# Altium PCB Controller_layout_typeC.PcbDoc
Units mil, origin at the board's own origin, x right, y up, seen from the top; angles counter-clockwise.
Board outline 1390.03 x 1150.03 mil, 2 copper layers (Top Layer, Bottom Layer); 23 components, 46 nets, 169 pads, 64 vias.
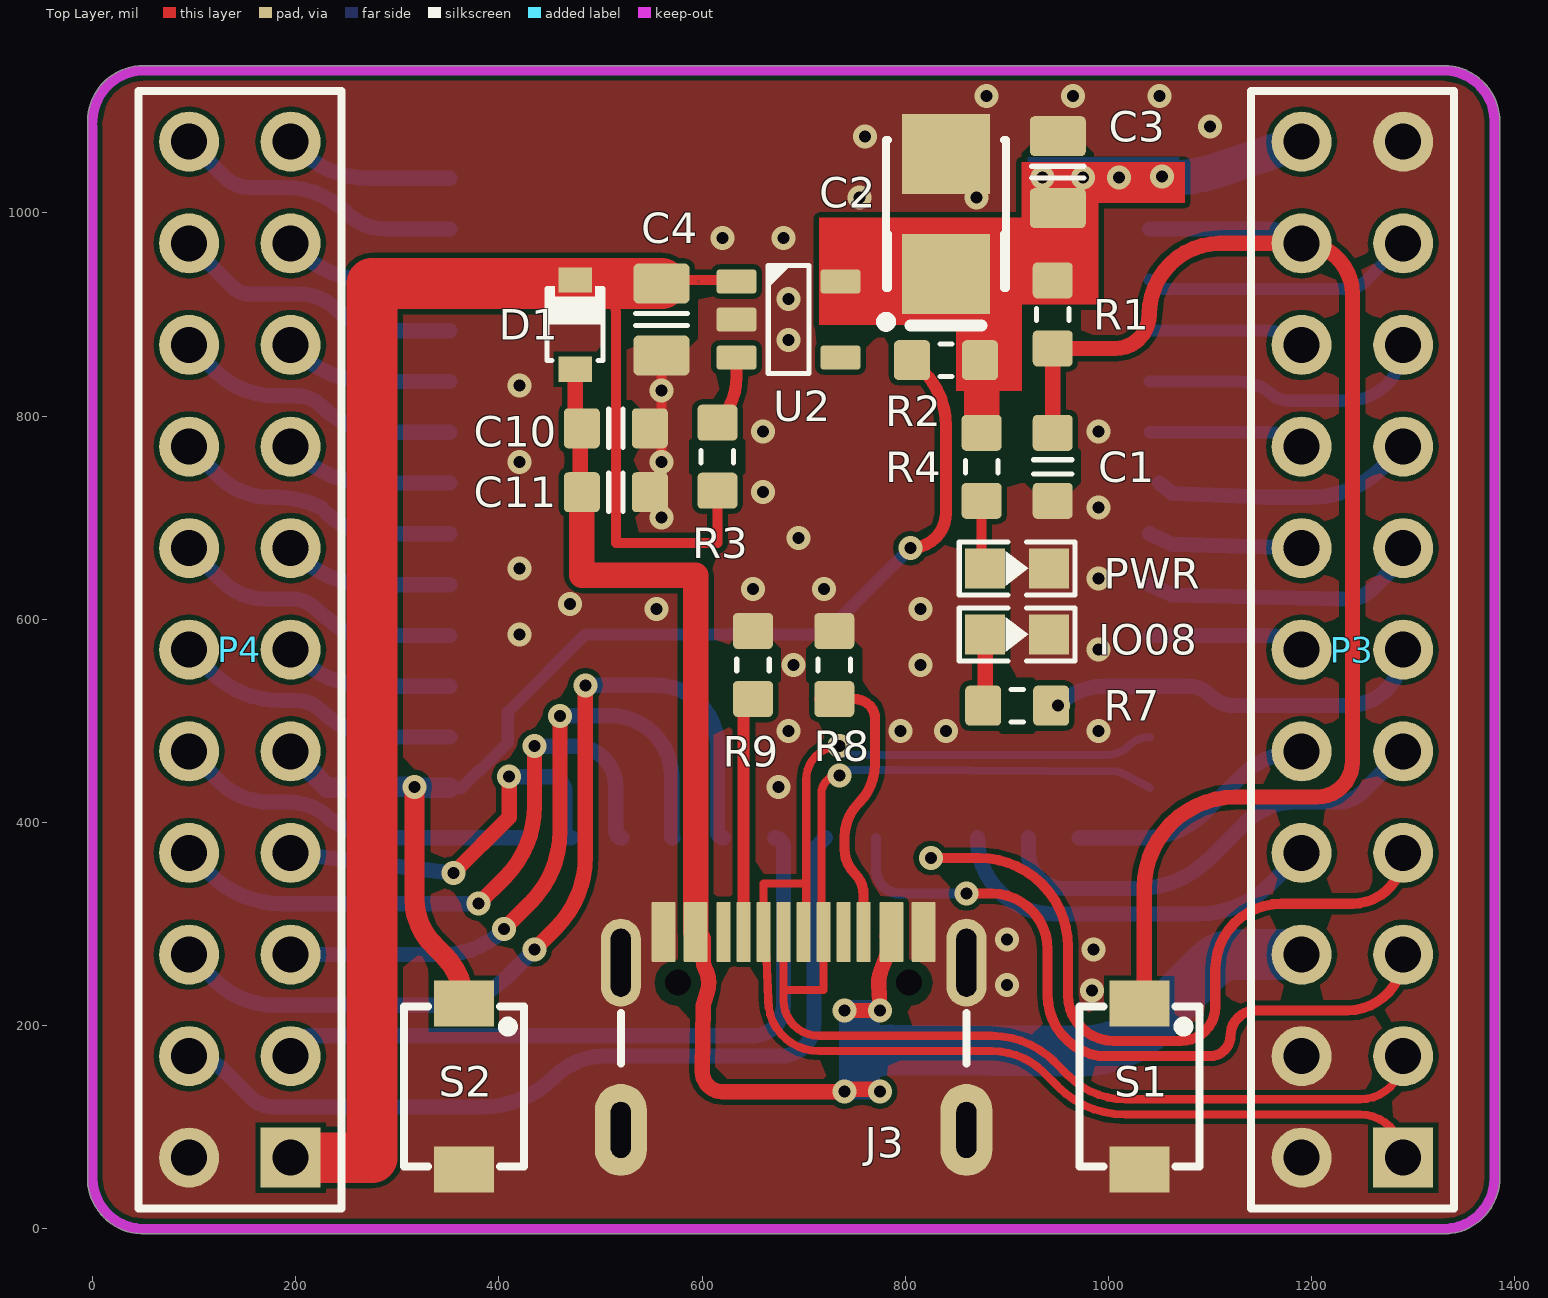
[diagram p0: Top Layer view]
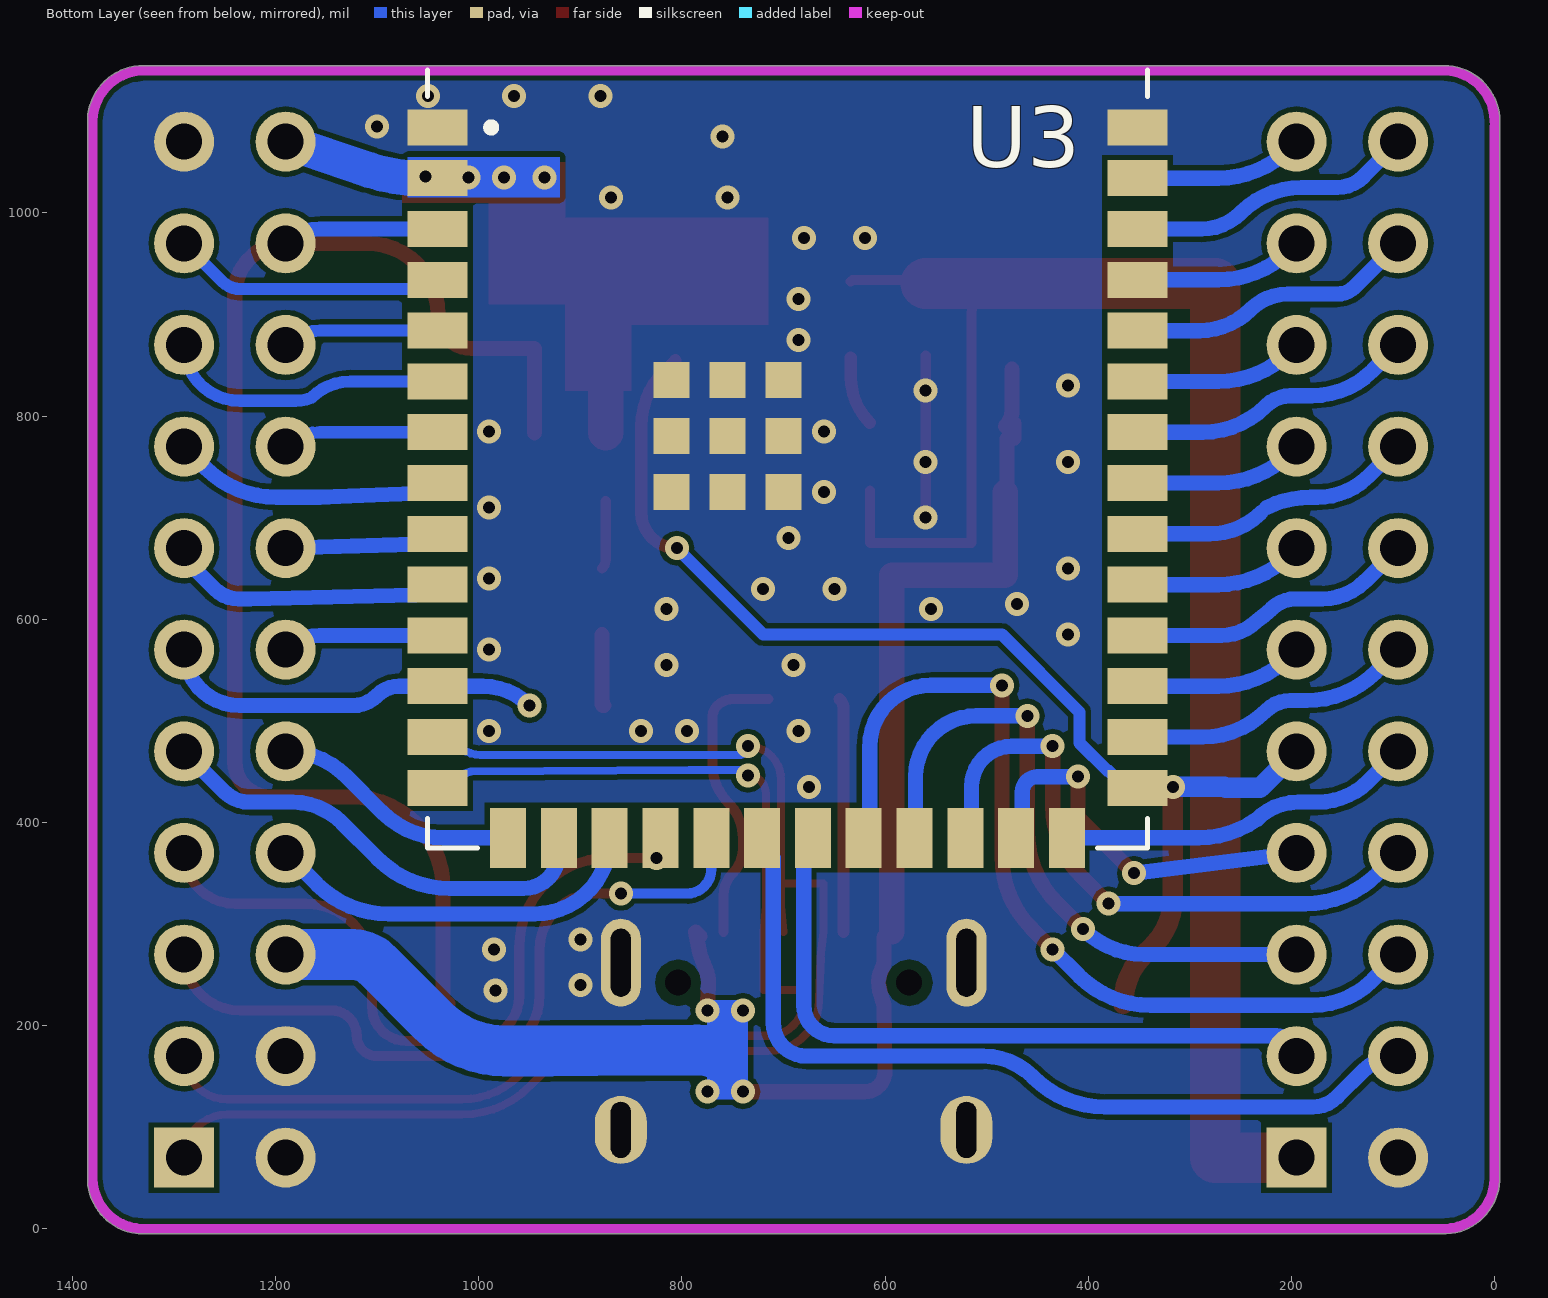
[diagram p1: Bottom Layer view, seen from below]
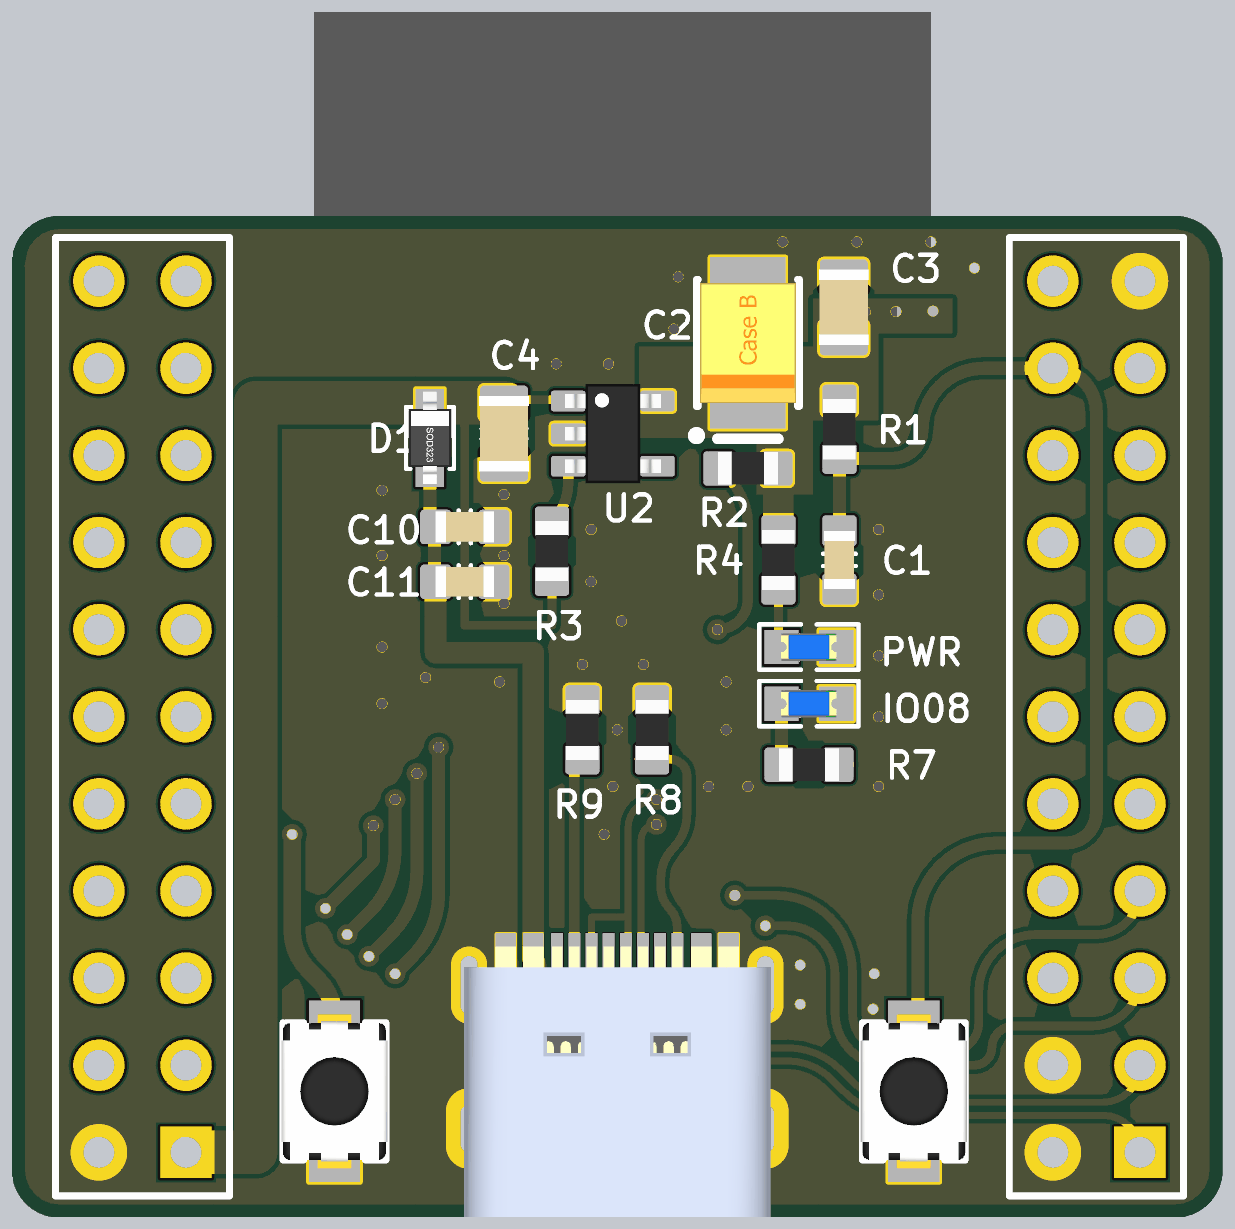
[diagram p2: 3D render of the assembled board from above, using the file's embedded part models]

## Layer stack, top to bottom
Top Solder: solder mask 0.4, Solder Resist, Dk 3.5
Top Layer: signal copper 1.4
Dielectric 1: dielectric 12.6, FR-4, Dk 4.8
Bottom Layer: signal copper 1.4
Bottom Solder: solder mask 0.4, Solder Resist, Dk 3.5

## Board outline
47.61,-4.96 cw(c50,50) -4.96,47.61 -5.01,48.33 -5.01,1090 cw(c50,1090) 50,1145.02 1330,1145.01 cw(c1330,1090) 1384.56,1097.1 1385.01,1095 1385.01,45 1384.56,42.9 cw(c1330,50) 1337.1,-4.56 1335,-5.01

## Design rules (kind name [scope] priority, off if disabled: settings)
BoardOutlineClearance [All] p1: gap=7.87 ignorepadtopadclearanceinfootprint=FALSE
Clearance [All] p1: gap=5 ignorepadtopadclearanceinfootprint=FALSE except(9.84: Arc-Hole Track-Hole SMDPad-Hole THPad-Hole Via-Hole Fill-Hole Poly-Hole Region-Hole Text-Hole)
ComponentClearance [All] p1: gap=5 collisioncheckmode=3 verticalgap=5 showdistances=TRUE
DiffPairsRouting [All] p1: maxlimit=10 minlimit=5 mostfreqgap=5 toplayer_minwidth=5 toplayer_maxwidth=1000 toplayer_prefwidth=5 bottomlayer_minwidth=5 bottomlayer_maxwidth=1000 bottomlayer_prefwidth=5 maxuncoupledlength=500
Height [All] p1: minheight=0 maxheight=71497.94 prefheight=500
HoleSize [All] p1: absolutevalues=TRUE maxlimit=248.03 minlimit=11.81 maxpercent=80.000 minpercent=20.000
HoleToHoleClearance [All] p1: gap=9.84 allowstackedmicrovias=FALSE
MinimumAnnularRing [All] p1: minimumring=3
MinimumSolderMaskSliver [All] p1: minsoldermaskwidth=0
PlaneClearance [All] p1: clearance=5
PlaneConnect PlaneConnectPowerPads [InPadClass('PowerPads')] p1: planeconnectstyle=Direct reliefexpansion=20 reliefentries=4 reliefconductorwidth=10 reliefairgap=10
PlaneConnect [All] p2: planeconnectstyle=Direct reliefexpansion=11.81 reliefentries=4 reliefconductorwidth=5 reliefairgap=5
PolygonConnect PolygonConnectPowerPads [All vs (InPadClass('PowerPads'))] p1: connectstyle=Direct reliefconductorwidth=10 reliefentries=4 polygonreliefangle="90 Angle" airgapwidth=10
PolygonConnect [All] p2: connectstyle=Direct reliefconductorwidth=5 reliefentries=4 polygonreliefangle="90 Angle" airgapwidth=5
RoutingVias [All] p1: holewidth=11.81 width=23.62 viastyle="Through Hole" minholewidth=11.81 minwidth=23.62 maxholewidth=23.62 maxwidth=259.84
SilkToSilkClearance [All] p1: silktosilkclearance=0
SilkToSolderMaskClearance [IsPad] p1: minsilkscreentomaskgap=5 clearancetoexposedcopper=TRUE
SolderMaskExpansion [All] p1: expansion=2.95 istentingtop=FALSE
Width [All] p1: maxlimit=1000 minlimit=5 preferedwidth=5 minimp=50.000000 maximp=50.000000 favimp=50.000000
20 further rules are at their usual default settings.

## Classes and differential pairs
differential pair D: +D_P -D_N

## Components (designator, comment, footprint, x,y, rotation, side; value= is the part's Value field where it differs from the comment)
C1 "Cap Semi" CAPC1608X90N 945,750 r90 top value=10uF
C2 "100uF TAJB107M006RNJ" SMT_C_Tantalum_B 840,999.06 r90 top
C3 "10uF 25V" CAPC2012X135N 950,1040 r90 top
C4 "10uF 25V" CAPC2012X135N 560,895 r270 top
C10 "Cap Semi" CAPC1608X90N 515,787.93 r180 top value=10uF
C11 "Cap Semi" CAPC1608X90N 515,725 r0 top value=100nF
D1 "1N5819/SS14/S4(SOD_323)" SMT_DIODE_SOD_323 475,890 r90 top
IO08 "BLUE" SMT_LED_0603 910,585 r0 top (schematic designator LED1)
J3 "USB-C" "USB-C 8p" 690,-5 r0 top
P3 "Header 11X2" HDR2X11 1290,70 r90 top locked
P4 "Header 11X2" HDR2X11 195,70 r90 top locked
PWR "BLUE" SMT_LED_0603 910,650 r0 top (schematic designator LED2)
R1 "Resistor" RESC1608N_ZERO 945,900 r90 top value=10K
R2 "Resistor" RESC1608N_ZERO 840,855 r0 top value=10K
R3 "Resistor" RESC1608N_ZERO 615,760 r270 top value=10K
R4 "Resistor" RESC1608N_ZERO 875,750 r270 top value=1K
R7 "Resistor" RESC1608N_ZERO 910,515 r180 top value=1K
R8 "Resistor" RESC1608N_ZERO 650,555 r270 top value=10K
R9 "Resistor" RESC1608N_ZERO 730,555 r90 top value=10K
S1 "KEY_RST/USER" SMT_SW_PTS_820 1030.43,140 r270 top
S2 "KEY_RST/USER" SMT_SW_PTS_820 365.43,140 r270 top
U2 "AP2112K-3.3TRG1" SOT23-5 685,895 r0 top
U3 "ESP32-S3-WROOM-1-N4R2" ESP32-S3-WROOM-1_NO-KEEPOUT 696.06,876.97 r180 bottom locked

## Footprints (in the part's own frame and the unit in brackets; to place one, negate y for a bottom-side part, rotate by r counter-clockwise, add the part's x,y. Pads: shape width x height; smd on the part's side, far side on the other; paste and mask are expansions set on the pad)
CAPC1608X90N [mm] "Chip Capacitor, Body 1.6x0.8mm, EIA 0603, IPC Medium Density"
  round 0.254 on Mech15: 0(0,0)
  rrect25% 0.9x1 smd: 1(-0.85,0) 2(0.85,0)
  Top Layer pour cut-out: -0.6,0.5 -0.4,0.7 0.4,0.7 0.6,0.5 0.6,-0.5 0.4,-0.7 -0.4,-0.7 -0.6,-0.5
  silkscreen extent -0.18,-0.48 0.18,0.48, body extent -0.85,-0.45 0.85,0.45, height 0.89
CAPC2012X135N [mm] "Chip Capacitor, Body 2.0x1.2mm, EIA 0805, IPC Medium Density"
  round 0.254 on Mech15: 0(0,0)
  rrect25% 1x1.4 smd: 1(-0.9,0) 2(0.9,0)
  Top Layer pour cut-out: -0.675,0.7 -0.475,0.9 0.475,0.9 0.675,0.7 0.675,-0.7 0.475,-0.9 -0.475,-0.9 -0.675,-0.7
  silkscreen extent -0.15,-0.65 0.15,0.65, body extent -1.1,-0.72 1.1,0.73, height 1.34
ESP32-S3-WROOM-1_NO-KEEPOUT [mm]
  rect 1.5x0.9 smd: 1(-8.75,5.26) 2(-8.75,3.99) 3(-8.75,2.72) 4(-8.75,1.45) 5(-8.75,0.18) 6(-8.75,-1.09) 7(-8.75,-2.36) 8(-8.75,-3.63) 9(-8.75,-4.9) 10(-8.75,-6.17) 11(-8.75,-7.44) 12(-8.75,-8.71) 13(-8.75,-9.98) 14(-8.75,-11.25) 27(8.75,-11.25) 28(8.75,-9.98) 29(8.75,-8.71) 30(8.75,-7.44) 31(8.75,-6.17) 32(8.75,-4.9) 33(8.75,-3.63) 34(8.75,-2.36) 35(8.75,-1.09) 36(8.75,0.18) 37(8.75,1.45) 38(8.75,2.72) 39(8.75,3.99) 40(8.75,5.26)
  rect 0.9x1.5 smd: 15(-6.985,-12.5) 16(-5.715,-12.5) 17(-4.445,-12.5) 18(-3.175,-12.5) 19(-1.905,-12.5) 20(-0.635,-12.5) 21(0.635,-12.5) 22(1.905,-12.5) 23(3.175,-12.5) 24(4.445,-12.5) 25(5.715,-12.5) 26(6.985,-12.5)
  rect 0.9x0.9 smd: 41_1(-1.5,-2.46) 41_2(-2.9,-2.46) 41_3(-0.1,-2.46) 41_4(-2.9,-3.86) 41_5(-1.5,-3.86) 41_6(-0.1,-3.86) 41_7(-2.9,-1.06) 41_8(-1.5,-1.06) 41_9(-0.1,-1.06)
  silkscreen extent -9,-12.75 9,6.7, body extent -9,-12.75 9,12.75, height 3.25
HDR2X11 [mm] "Connector; Header; 11x2 Position"
  rect 1.5x1.5 hole 0.9: 1(0,0)
  round 1.5 hole 0.9: 2(0,2.54) 3(2.54,0) 4(2.54,2.54) 5(5.08,0) 6(5.08,2.54) 7(7.62,0) 8(7.62,2.54) 9(10.16,0) 10(10.16,2.54) 11(12.7,0) 12(12.7,2.54) 13(15.24,0) 14(15.24,2.54) 15(17.78,0) 16(17.78,2.54) 17(20.32,0) 18(20.32,2.54) 19(22.86,0) 20(22.86,2.54) 21(25.4,0) 22(25.4,2.54)
  silkscreen extent -1.27,-1.27 26.67,3.81, body extent -1.27,-1.27 26.67,3.81, height 1.5
RESC1608N_ZERO [mm] "Chip Resistor, Body 1.6x0.8mm, 0603, IPC Medium Density"
  round 0.254 on Mech15: 0(0,0)
  rrect25% 0.9x1 smd: 1(-0.85,0) 2(0.85,0)
  Top Layer pour cut-out: -0.6,0.5 -0.4,0.7 0.4,0.7 0.6,0.5 0.6,-0.5 0.4,-0.7 -0.4,-0.7 -0.6,-0.5
  silkscreen extent -0.15,-0.41 0.15,0.41, body extent -0.87,-0.47 0.88,0.48, height 0.54
SMT_C_Tantalum_B [mm]
  rect 2x2.2 smd: 1(-1.5,0) 2(1.5,0)
  silkscreen extent -2.82,-1.5 1.85,1.62, body extent -1.75,-1.4 1.75,1.4, height 1.9
SMT_DIODE_SOD_323 [mm]
  rect 0.63x0.83 smd: 1(-1.115,0) 2(1.115,0)
  silkscreen extent -0.9,-0.7 0.96,0.7, body extent -1.35,-0.62 1.35,0.62, height 1.1
SMT_LED_0603 [mm]
  rect 1x1 smd: 1(-0.8,0) 2(0.8,0)
  silkscreen extent -1.45,-0.66 1.45,0.66, body extent -0.81,-0.4 0.81,0.4, height 0.6
SMT_SW_PTS_820 [mm]
  rect 1.143x1.5 smd: 1(-2.075,0) 2(2.075,0)
  round 0 all layers, no hole paste-2.54 mask-2.54: MH1(0,0.9) MH2(0,-0.9)
  silkscreen extent -2,-1.5 2,1.5, body extent -2.25,-1.55 2.25,1.55, height 2.05
SOT23-5 [mm]
  round 0.5 on Mech15: 0(0,0)
  rrect25% 1x0.6 smd: 1(-1.3,0.95) 2(-1.3,0) 3(-1.3,-0.95) 4(1.3,-0.95) 5(1.3,0.95)
  silkscreen extent -0.51,-1.35 0.51,1.35, body extent -1.4,-1.45 1.4,1.45, height 1.44
"USB-C 8p" [mm]
  rrect10% 0.6x1.5 smd mask+0.025: A1/B12(-3.25,7.55) A4/B9(-2.45,7.55) A9/B4(2.45,7.55) A12/B1(3.25,7.55)
  rrect10% 0.35x1.5 smd mask+0.025: A5(-1.25,7.55) A6(-0.25,7.55) A6(0.75,7.55) A7(-0.75,7.55) A7(0.25,7.55) B5(1.75,7.55) ""(-1.75,7.55) ""(1.25,7.55)
  oval 1.3x2.3 / inner oval 1.3x2.3 / far side oval 1.3x1.7 hole 1.4 slot 0.5 at 0 deg mask+0.025: SHLD(-4.32,2.6) SHLD(4.32,2.6)
  oval 1x2.2 hole 1.7 slot 0.5 at 0 deg mask+0.025: SHLD(-4.32,6.78) SHLD(4.32,6.78)
  round 0 hole 0.65 unplated mask+0.025: ""(-2.89,6.28) ""(2.89,6.28)
  silkscreen extent -4.32,4.26 4.32,5.52, body extent -4.47,0 4.47,7.9, height 3.2

## Part data
C1 C10: library part CAP-SM-0603-X5R-10uF, "CAP SM 0603 X5R 10uF 10%", Supplier Part Number 1=2366833, Tolerance=±10%, Supplier 1=Farnell, Supplier 2=Digi-Key, Supplier Part Number 2=490-3896-1-ND
C2: library part SMT_C_Tantalum_B, "Capacitor, SM Tantalum; Body 3.5 x 2.8 mm (LxW typ)"
C3 C4: library part SMT_C_0805, "Surface mount capacitor 0805"
C11: library part CAP-SM-0603-X7R-100nF, "CAP SM 0603 X7R 100nF 10%", Supplier Part Number 1=490-3167-1-ND, Tolerance=±10%, Supplier 1=Digi-Key, Supplier 2=Farnell, Supplier Part Number 2=1775994RL
D1: library part SMT_DIODE_SCHOTTKY_SOD_323, "Surface mount schottky diode SOD-323(0805) Package"
IO08 PWR: library part SMT_LED_0603, "SMT LED"
P3 P4: "Header, 11-Pin, Dual row", LatestRevisionDate=17-Jul-2002, LatestRevisionNote="Re-released for DXP Platform.", Publisher="Altium Limited"
R1 R2 R3 R8 R9: library part RES-SM-0603-10K, "RES SM 0603 10K", Supplier Part Number 1=9330399, Supplier 1=Farnell, Supplier 2=Digi-Key, Supplier Part Number 2=541-10.0KHCT-ND
R4 R7: library part RES-SM-0603-1K, "RES SM 0603 1K"
S1 S2: library part SMT_SW_PTS_820, "SMT Tactile ‎Switch PTS 820 Series"
U2: "Linear Voltage Regulator IC 1 Output 600mA SOT-25", Package="SOT-753 Diodes Inc.", Digi-Key_Part_Number=AP2112K-3.3TRG1DICT-ND, Digi-Key_Purchase_URL=https://www.digikey.com.au/product-detail/en/diodes-incorporated/AP2112K-3.3TRG1/AP2112K-3.3TRG1DICT-ND/4505257?utm_source=snapeda&utm_medium=aggregator&utm_campaign=symbol, MF="Diodes Inc.", MP=AP2112K-3.3TRG1, SnapEDA_Link=https://www.snapeda.com/parts/AP2112K-3.3TRG1/Diodes%20Inc./view-part/454988/?ref=snap
U3: library part ESP32-S3-WROOM-1, "Multiprotocol Modules SMD Module, ESP32-S3R8, 3.3V, 8 MB Octal PSRAM Die, 16 MB Quad SPI Flash, PCB Antenna", MPN=ESP32-S3-WROOM-1-N16R2, Package="Module Espressif Systems", Check_prices=https://www.snapeda.com/parts/ESP32-WROOM-32/Espressif+Systems/view-part/?ref=eda, Digi-Key_Part_Number=1965-ESP32-S3-WROOM-1-N16R2TR-ND, MF="Espressif Systems", price=3.98, SnapEDA_Link=https://www.snapeda.com/parts/ESP32-WROOM-32/Espressif+Systems/view-part/?ref=snap, Supplier=Digikey, Supplier Link=https://www.digikey.com/en/products/detail/espressif-systems/ESP32-S3-WROOM-1-N16R2/16162644

## Via types
v1: diameter 23.62, hole 11.81, Top Layer to Bottom Layer, tented both sides, 64 vias

## Nets (pads, with @x,y where several pads share a name; then routed paths per layer and width w, separated by ;. In a path a pad name is that pad's centre, name@x,y a point inside that pad or via, vN(x,y) a via of type N, cw(c..) or ccw(c..) an arc to the next point about the centre after c; other vN are vias at no path point)
3.3V: C2.1 C3.1 P3.22 R1.2 R2.2 R4.1 U2.5 U3.2 | length 508.4
  Top Layer w8: U2.5 942.43,932.4 ccw(c942.43,936.03) R1.2 ccw(c932.93,945.54) 950,945.54 C3.1
  Top Layer w35: R2.2 cw(c869.76,851.29) 875,851.29 R4.1
  Bottom Layer w35: U3.2 1058.22,1034.05 ccw(c1058.22,1188.6) 1107.7,1042.19 P3.22
  other v1: 935,1035 975,1035 1010,1035 1052.4,1035.6
5V: C4.1 D1.2 P4.1 R3.2 U2.1 | length 1713.1
  Top Layer w10: 497.61,930.43 cw(c483.52,903.52) 505,925 cw(c480.86,900.86) 515,900.86 515,675 615,675 R3.2 ; C4.1@560,933.9 630.21,933.9 cw(c630.21,928.79) U2.1
  Top Layer w50: P4.1 275,70 275,930.43 497.61,930.43 C4.1
D_N: J3.A7 P3.1 U3.13 | length 1367.7
  Top Layer w8: J3.A7@699.84,292.24 702.37,317.77 702.37,442.37 cw(c735,442.37) 715.05,468.19 cw(c735,442.37) 730.45,474.68 cw(c735,442.37) v1(735,475) ; 699.84,340 660.47,340 660.47,292.24 663.36,266.72 665,225.15 cw(c657,225) 665,225 ccw(c715,225) 715,175 885,175 cw(c885,102.57) 936.21,153.79 950.04,139.96 ccw(c1016.34,206.26) 1016.34,112.5 1247.5,112.5 cw(c1247.5,70) P3.1
  Bottom Layer w8: v1(735,475) ccw(c743.44,475) 743.44,466.56 792.9,466.56 799.53,466.56 998.3,466.56 ccw(c998.3,497.79) 1020.39,475.7 cw(c1040.55,455.54) U3.13
D_P: J3.A6 P3.3 U3.14 | length 1370.8
  Top Layer w8: v1(735,446.38) ccw(c735,428.74) 717.37,428.74 717.37,317.77 719.53,292.24 719.53,235 680.16,235 680.16,292.24 680,292.24 680,225 ccw(c715,225) 715,190 885.04,190 cw(c885.04,102.68) 946.79,164.42 960.61,150.61 ccw(c1016.39,206.39) 1016.39,127.5 1247.5,127.5 ccw(c1247.5,170) P3.3
  Bottom Layer w8: v1(735,446.38) cw(c740.14,446.38) 740.14,451.52 792.81,451.52 1007.43,450.19 1007.8,450.08 1015.02,447.77 U3.14
GND: C1.1 C2.2 C3.2 C4.2 C10.1 C11.2 IO08.2 J3.A1/B12 J3.A12/B1 J3.SHLD P3.2 P3.4 P3.21 P4.2 PWR.2 R8.1 R9.2 S1.2 S2.2 U2.2 U3.1 U3.40 U3.41_1 U3.41_2 U3.41_3 U3.41_4 U3.41_5 U3.41_6 U3.41_7 U3.41_8 U3.41_9 | length 159.6
  Top Layer w10: v1(560,700) v1(560,755) v1(560,825) C4.2
  other v1: 983.57,234.43 900,240 985,275 900,285 675,435 685,490 795,490 840,490 990,490 690,555 815,555 990,570 420,585 555,610 815,610 470,615 650,630 720,630 990,640 420,650 695,680 990,710 660,725 420,755 660,785 990,785 420,830 685,875 685,915 620,975 680,975 755,1015 870,1015 760,1075 1100,1085 880,1115 965,1115 1050,1115
IO0: P4.9 R2.1 S2.1 U3.27 | length 1185
  Top Layer w12: v1(805,670) ccw(c805,705) 840,705 840,790 ccw(c763.87,790) 826.96,832.6 ccw(c763.87,790) 817.7,843.83 R2.1
  Top Layer w20: v1(316.81,435) 316.81,324.83 316.81,324.77 ccw(c380.98,324.77) 335.59,279.41 335.68,279.32 345.72,269.28 cw(c298.14,221.69) S2.1
  Bottom Layer w12: U3.27 363.39,434.06 380.11,450.78 381.1,450.78 408.54,478.22 408.54,508.54 485,585 720,585 v1(805,670)
  Bottom Layer w20: P4.9 201.66,463.34 230.94,434.06 265,434.06 265.94,435 v1(316.81,435) ; v1@315.94,434.06 U3.27
IO01: P4.21 U3.39 | length 167.2
  Bottom Layer w15: P4.21 201.66,1063.34 ccw(c272.37,1134.06) 272.37,1034.06 U3.39
IO02: P4.22 U3.38 | length 284.6
  Bottom Layer w15: P4.22 129.39,1035.61 ccw(c155,1061.21) 155,1025 189.64,1025 cw(c189.64,939.64) 250,1000 ccw(c288.49,1038.49) 288.49,984.06 U3.38
IO03: P3.10 U3.15 | length 246.9
  Bottom Layer w15: U3.15 1034.26,384.84 ccw(c1034.26,470.74) 1095,410 1130.25,445.25 cw(c1190,385.5) P3.10
IO04: P3.19 U3.4 | length 270.7
  Bottom Layer w12: U3.4 1049.61,925 1234.14,925 ccw(c1234.14,951.21) 1252.68,932.68 P3.19
IO05: P3.18 U3.5 | length 153.2
  Bottom Layer w12: U3.5 1156.07,884.06 cw(c1156.07,836.07) P3.18
IO06: P3.17 U3.6 | length 285.5
  Bottom Layer w12: U3.6 1126.04,834.06 cw(c1126.04,779.85) 1148.92,828.99 cw(c1126.04,779.85) 1164.36,818.18 ccw(c1180.26,856.29) 1180.26,815 1235,815 ccw(c1235,870) P3.17
IO07: P3.16 U3.7 | length 153.2
  Bottom Layer w12: U3.7 1156.07,784.06 cw(c1156.07,736.07) P3.16
IO08: P3.11 U3.12 | length 381.6
  Bottom Layer w15: v1(950,515) cw(c996,469) 996,534.06 U3.12 1078.14,534.06 cw(c1078.14,503.14) 1100,525 ccw(c1124.14,549.14) 1124.14,515 1235,515 ccw(c1235,570) P3.11
IO9: P3.8 U3.17 | length 382.6
  Bottom Layer w15: U3.17 871.06,383.94 ccw(c945,383.94) 880,348.7 ccw(c945,383.94) 945,310 1088.58,310 ccw(c1088.58,410) 1159.29,339.29 P3.8
IO10: P3.7 U3.18 | length 709.3
  Top Layer w10: v1(825,365) 872.5,365 cw(c872.5,277.5) 960,277.5 960,230 ccw(c1005,230) 1005,185 1071.31,185 ccw(c1071.31,218.69) 1105,218.69 1105,255 cw(c1170,255) 1170,320 1240,320 ccw(c1240,370) P3.7
IO11: P3.5 U3.19 | length 731.7
  Top Layer w10: v1(860,330) 885,330 cw(c885,275) 940,275 940,230 ccw(c1000.95,230) 990.24,170 1099.96,170 ccw(c1099.96,190.04) 1120,190.04 cw(c1144.96,190.04) 1144.96,215 1235,215 ccw(c1235,270) P3.5
  Bottom Layer w10: U3.19 771.06,353.94 ccw(c795,353.94) 795,330 v1(860,330)
IO12: P4.4 U3.20 | length 841.1
  Bottom Layer w15: P4.4 cw(c95,121.72) 129.14,155.86 155,130 ccw(c179.14,154.14) 179.14,120 383.58,120 ccw(c383.58,220) 454.29,149.29 455,150 cw(c503.28,101.72) 503.28,170 677.39,170 ccw(c677.39,202.61) 710,202.61 U3.20@710,365 ; U3.20@710.85,374.63 U3.20
IO13: P4.3 U3.21 | length 683.5
  Bottom Layer w15: P4.3 cw(c215,170) 215,190 650,190 ccw(c650,220) 680,220 680,375.91 ccw(c671.06,375.91) U3.21
IO14: P4.6 U3.22 | length 909.8
  Top Layer w15: v1(435,275) 455.71,295.71 ccw(c385,366.42) 485,366.42 v1(485,535)
  Bottom Layer w15: P4.6 120.25,244.75 ; 120.28,244.72 ccw(c180,304.5) 180,220 338.58,220 ccw(c338.58,320) 409.29,249.29 v1(435,275) ; v1(485,535) 555,535 cw(c555,475) 615,475 615,390.91 ccw(c621.06,390.91) U3.22
IO15: P3.15 U3.8 | length 260.1
  Bottom Layer w15: U3.8@1050,734.06 1062.58,723.84 1114.9,721.71 1156.79,720 1198.58,720 ccw(c1198.58,820) 1269.29,749.29 P3.15
IO16: P3.14 U3.9 | length 151.8
  Bottom Layer w15: U3.9 1062.58,673.84 P3.14
IO17: P3.13 U3.10 | length 275.8
  Bottom Layer w15: U3.10 1062.58,623.84 1225,620 1235.86,620 ccw(c1235.86,654.14) 1260,630 1282.93,652.93 ccw(c1265.86,670) P3.13
IO18: P3.12 U3.11 | length 153.2
  Bottom Layer w15: U3.11 1156.07,584.06 cw(c1156.07,536.07) P3.12
IO21: P4.5 U3.23 | length 650.2
  Top Layer w15: v1(405,295) 430.71,320.71 ccw(c360,391.42) 460,391.42 v1(460,505)
  Bottom Layer w15: P4.5 344.64,270 ccw(c344.64,355.36) v1(405,295) ; v1(460,505) 510,505 cw(c510,445) 570,445 570,385.91 ccw(c571.06,385.91) U3.23
IO35: P4.12 U3.28 | length 282.7
  Bottom Layer w15: P4.12 116.72,548.28 ccw(c185,616.57) 185,520 200.86,520 cw(c200.86,485.86) 225,510 ccw(c287.64,572.64) 287.64,484.06 U3.28
IO36: P4.11 U3.29 | length 167.2
  Bottom Layer w15: P4.11 201.66,563.34 ccw(c272.37,634.06) 272.37,534.06 U3.29
IO37: P4.14 U3.30 | length 285.3
  Bottom Layer w15: P4.14 127.32,637.68 ccw(c170,680.36) 170,620 195.86,620 cw(c195.86,585.86) 220,610 ccw(c282.64,672.64) 234.06,598.56 ccw(c269.08,633.59) 269.08,584.06 U3.30
IO38: P4.13 U3.31 | length 167.2
  Bottom Layer w15: P4.13 201.66,663.34 ccw(c272.37,734.06) 272.37,634.06 U3.31
IO39: P4.16 U3.32 | length 275.7
  Bottom Layer w15: P4.16 123.79,741.21 ccw(c175,792.43) 138.28,730 ccw(c175,792.43) 175,720 181.02,720 cw(c181.02,620) 224.46,710.07 ; 230,705 ccw(c280.57,755.57) 252.76,689.68 ccw(c280.57,755.57) 280.57,684.06 U3.32
IO40: P4.15 U3.33 | length 167.2
  Bottom Layer w15: P4.15 201.66,763.34 ccw(c272.37,834.06) 272.37,734.06 U3.33
IO41: P4.18 U3.34 | length 283.3
  Bottom Layer w15: P4.18 120.25,844.75 ccw(c180,904.5) 180,820 200.86,820 cw(c200.86,785.86) 225,810 ccw(c287.64,872.64) 287.64,784.06 U3.34
IO42: P4.17 U3.35 | length 167.2
  Bottom Layer w15: P4.17 201.66,863.34 ccw(c272.37,934.06) 272.37,834.06 U3.35
IO43: P4.19 U3.37 | length 167.2
  Bottom Layer w15: P4.19 201.66,963.34 ccw(c272.37,1034.06) 272.37,934.06 U3.37
IO44: P4.20 U3.36 | length 285.9
  Bottom Layer w15: P4.20 137.93,927.07 ccw(c155,944.14) 155,920 203.79,920 cw(c203.79,868.79) 240,905 ccw(c290.57,955.57) 290.57,884.06 U3.36
IO45: P4.10 U3.26 | length 352.1
  Bottom Layer w15: P4.10 124.38,440.62 ccw(c174.16,490.41) 174.16,420 193.33,420 cw(c193.33,362.82) 224.2,410.95 cw(c193.33,362.82) 233.76,403.25 ccw(c291.58,484.84) 291.58,384.84 U3.26
IO46: P3.9 U3.16 | length 451
  Bottom Layer w15: U3.16 921.06,370 ccw(c956.06,370) 956.06,335 1028.58,335 ccw(c1028.58,435) 1099.29,364.29 1135,400 cw(c1183.28,351.72) 1183.28,420 1225.86,420 ccw(c1225.86,454.14) 1249.98,429.98 P3.9
IO47: P4.8 U3.24 | length 631.3
  Top Layer w15: v1(380,320) 405.71,345.71 ccw(c335,416.42) 435,416.42 v1(435,475)
  Bottom Layer w15: P4.8 115.71,349.29 ccw(c186.42,420) 186.42,320 v1(380,320) ; v1(435,475) 475,475 cw(c475,435) 515,435 515,390.91 ccw(c521.06,390.91) U3.24
IO48: P4.7 U3.25 | length 391.2
  Top Layer w15: v1(355,350) 410,405 v1(410,445)
  Bottom Layer w15: P4.7 v1(355,350) ; v1(410,445) 450,445 cw(c450,430) 465,430 465,390.91 ccw(c471.06,390.91) U3.25
NetJ3_A5: J3.A5 R8.2 | length 230.4
  Top Layer w12: J3.A5 640.79,511.37 cw(c655.17,511.37) R8.2@645,521.54
NetJ3_B5: J3.B5 R9.1 | length 288.9
  Top Layer w10: R9.1@715,521.54 749.22,521.54 cw(c749.22,499.22) 765,515 cw(c752.93,502.93) 770,502.93 770,457.43 cw(c715.86,457.43) 754.14,419.14 ccw(c788.28,385) 740,385 740,374.14 ccw(c774.14,374.14) 750,350 cw(c728.52,328.52) 758.9,328.52 J3.B5
NetLED1_1: IO08.1 R7.1 R7.2 | length 76.4
  Top Layer w15: R7.2@878.5,519.75 cw(c871.78,519.75) R7.2 ccw(c876.54,516.97) 878.5,516.97 IO08.1
NetLED2_1: PWR.1 R4.2 | length 67.5
  Top Layer w10: R4.2 875,658.46 ccw(c886.96,658.46) PWR.1
NetR3_1: R3.1 U2.3 | length 69.2
  Top Layer w12: R3.1 ccw(c569.57,838.9) 633.82,838.9 U2.3
RESET: C1.2 P3.20 R1.1 S1.1 U3.3 | length 1471.1
  Top Layer w15: C1.2 R1.1 1006.54,866.54 ccw(c1006.54,900) 1040,900 cw(c1110,900) 1110,970 P3.20 cw(c1190,920) 1240,920 1240,460 cw(c1205,460) 1205,425 1125,425 ccw(c1125,335) 1035,335 1035,226.26 cw(c1030.43,226.26) S1.1
  Bottom Layer w15: U3.3 1156.07,984.06 cw(c1156.07,936.07) P3.20
VBUS: C10.2 C11.1 D1.1 J3.A4/B9 J3.A9/B4 P3.6 | length 1549.9
  Top Layer w15: C10.2@473.46,777.93 C10.2@473.46,792.93 ; D1.1 475,805.78 ccw(c497.31,805.78) C10.2@481.54,790 ; C11.1@480,725 C10.2@480,777.93 ; J3.A4/B9 cw(c593.54,284.65) 601.13,284.65 601.13,263.32 ccw(c616.13,263.32) 602.86,256.34 cw(c576.22,242.24) 605.15,233.78 601.13,220.07 600,155 ccw(c620,155) 620,135 v1(740,135) ; v1(740,215) v1(775,215) 773.68,240.7 cw(c803.78,242.24) 775.59,252.92 782.15,270.22 J3.A9/B4 J3.A9/B4@782.15,287.93
  Top Layer w25: C11.1 481.54,643.49 593.54,643.49 J3.A4/B9
  Bottom Layer w50: 760,170 765.58,172.32 cw(c784.81,126.17) 785.16,176.17 785.21,176.17 836.18,175.76 930,175 973.58,175 ccw(c973.58,275) 1044.29,204.29 1100,260 cw(c1124.14,235.86) 1124.14,270 P3.6
  other v1: 775,135
pads on no net: C1.0 C3.0 C4.0 C10.0 C11.0 J3. R1.0 R2.0 R3.0 R4.0 R7.0 R8.0 R9.0 S1.MH1 S1.MH2 S2.MH1 S2.MH2 U2.0 U2.4

## Polygon pours and split planes (outlines as drawn)
GND on Bottom Layer "GND_L02_P001" (solid, pour order 1): 2.69,1145.01 1387.53,1145.01 1387.53,5 1382.53,0 -2.53,0
GND on Top Layer "Top Layer-No Net" (solid, pour order 0): -1.55,1140 1381.55,1140 1381.55,33.55 1382.72,-3.49 1364.21,-3.49 3.6,-3.49

## Keep-outs
Keep-Out Layer:
  lines w10: 0,48.33 0,1085 ; 0,50 ccw(c50,50) 50,0 ; 0,1090 cw(c50,1090) 50,1140 1330,1140 cw(c1330,1090) 1380,1090 ; 48.33,0 1335,0 ; 1330,0 ccw(c1330,50) 1380,50 ; 1380,45 1380,1095

## Other copper
Top Layer:
  region net 3.3V: 1075,1050 914.57,1050 914.57,995 715,995 715,890 850,890 850,825 914.57,825 914.57,910 990,910 990,1010 1075,1010
  region net VBUS: 772.5,145 772.5,130 737.5,130 737.5,145
Bottom Layer:
  rectangle net 3.3V: 920,1015 1070,1055
  region net VBUS: 735,225 735,127.5 775,127.5 775,225
  region net VBUS: 740,142.5 740,127.5 775,127.5 775,142.5